# Altium PCB CapArray.PcbDoc
Units mil, origin at the board's own origin, x right, y up, seen from the top; angles counter-clockwise.
Board outline 2809.33 x 1157.4 mil, 2 copper layers (Top Layer, Bottom Layer); 100 components, 2 nets, 200 pads, 470 vias.
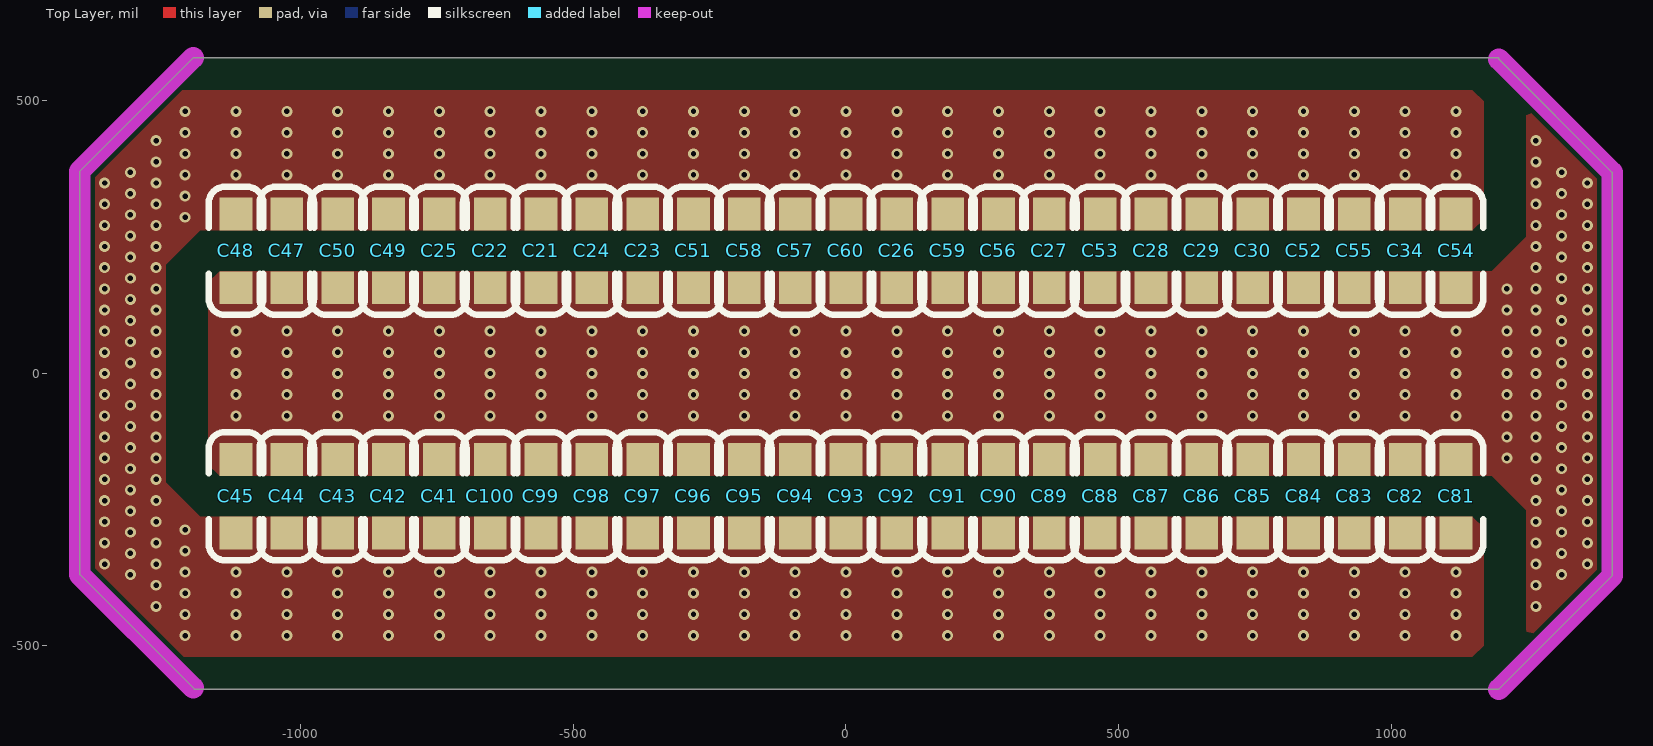
[diagram p0: Top Layer view]
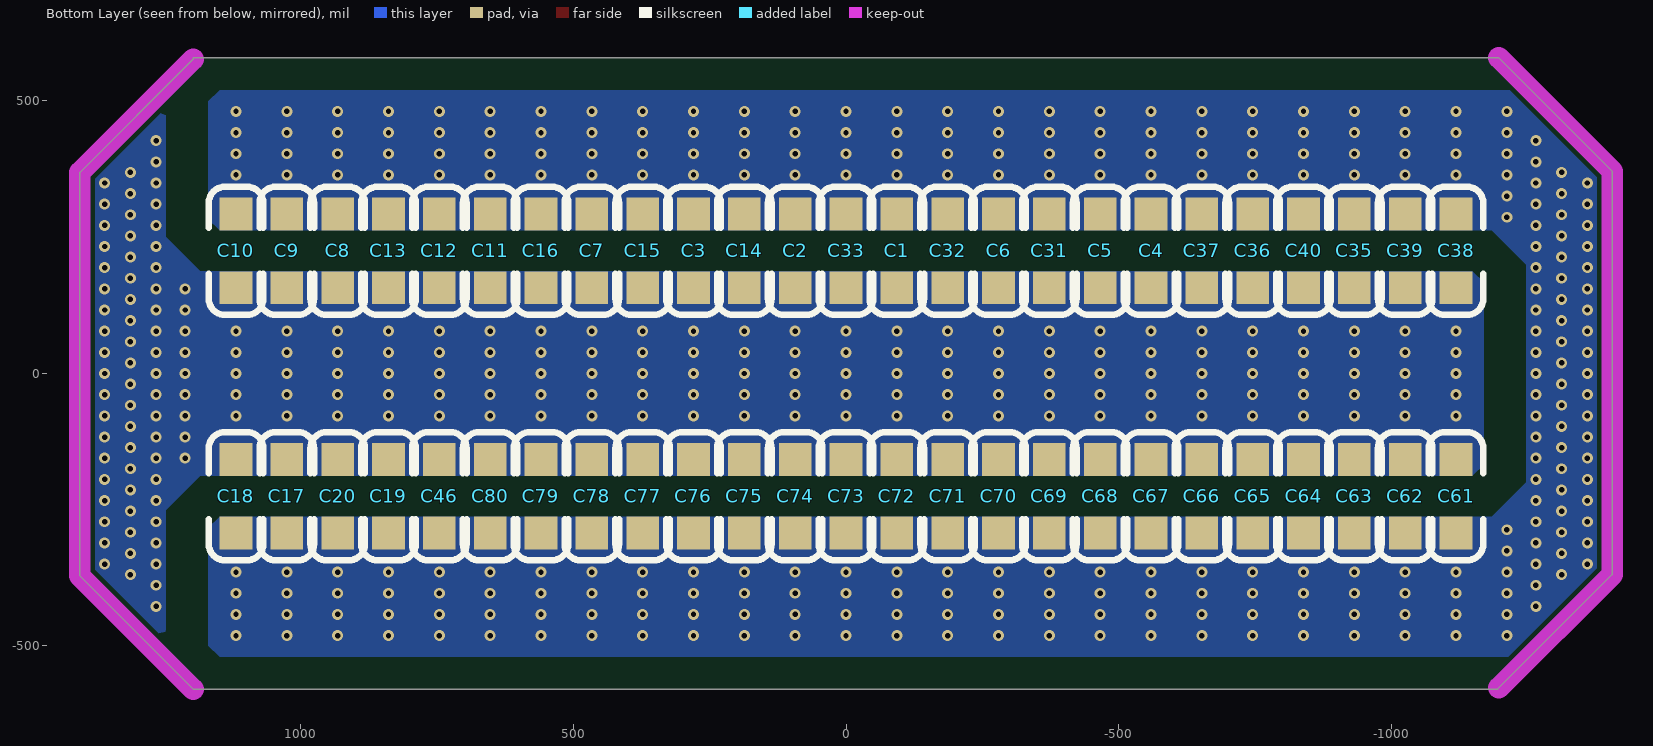
[diagram p1: Bottom Layer view, seen from below]

## Layer stack, top to bottom
Top Solder: solder mask 0.4, Solder Resist, Dk 3.5
Top Layer: signal copper 1.4
Dielectric 1: dielectric 12.6, FR-4, Dk 4.8
Bottom Layer: signal copper 1.4
Bottom Solder: solder mask 0.4, Solder Resist, Dk 3.5

## Board outline
-1404.66,-369.35 -1404.66,370.59 -1197.18,578.08 1197.18,578.08 1197.18,575.58 1404.66,368.09 1404.66,-369.34 1404.67,-371.85 1197.19,-579.33 -1194.68,-579.33

## Design rules (kind name [scope] priority, off if disabled: settings)
Clearance [All] p1: gap=8 ignorepadtopadclearanceinfootprint=FALSE
PlaneConnect [All] p1: planeconnectstyle=Direct reliefexpansion=20 reliefentries=4 reliefconductorwidth=10 reliefairgap=10
PolygonConnect [All] p1: connectstyle=Direct reliefconductorwidth=10 reliefentries=4 polygonreliefangle="90 Angle" airgapwidth=10
RoutingVias [All] p1: holewidth=28 width=50 viastyle="Through Hole" minholewidth=28 minwidth=50 maxholewidth=28 maxwidth=50
SolderMaskExpansion [All] p1: expansion=4 istentingtop=FALSE
SupplyNets "Schematic Supply Nets_1" [InNet('OUT')] p1: voltage=0.000
SupplyNets "Schematic Supply Nets" [InNet('IN')] p2: voltage=0.000
Width [All] p1: maxlimit=10 minlimit=10 preferedwidth=10
29 further rules are at their usual default settings.

## Components (designator, comment, footprint, x,y, rotation, side; value= is the part's Value field where it differs from the comment)
C1 "CAP" 1206C -93.2,156.85 r90 bottom
C2 "CAP" 1206C 93.2,156.85 r90 bottom
C3 "CAP" 1206C 279.61,156.85 r90 bottom
C4 "CAP" 1206C -559.22,156.85 r90 bottom
C5 "CAP" 1206C -466.02,156.85 r90 bottom
C6 "CAP" 1206C -279.61,156.85 r90 bottom
C7 "CAP" 1206C 466.02,156.85 r90 bottom
C8 "CAP" 1206C 932.04,156.85 r90 bottom
C9 "CAP" 1206C 1025.24,156.85 r90 bottom
C10 "CAP" 1206C 1118.44,156.85 r90 bottom
C11 "CAP" 1206C 652.43,156.85 r90 bottom
C12 "CAP" 1206C 745.63,156.85 r90 bottom
C13 "CAP" 1206C 838.83,156.85 r90 bottom
C14 "CAP" 1206C 186.41,156.85 r90 bottom
C15 "CAP" 1206C 372.81,156.85 r90 bottom
C16 "CAP" 1206C 559.22,156.85 r90 bottom
C17 "CAP" 1206C 1025.24,-158.11 r270 bottom
C18 "CAP" 1206C 1118.45,-158.11 r270 bottom
C19 "CAP" 1206C 838.83,-158.11 r270 bottom
C20 "CAP" 1206C 932.04,-158.11 r270 bottom
C21 "CAP" 1206C -559.22,156.85 r90 top
C22 "CAP" 1206C -652.43,156.85 r90 top
C23 "CAP" 1206C -372.81,156.85 r90 top
C24 "CAP" 1206C -466.02,156.85 r90 top
C25 "CAP" 1206C -745.63,156.85 r90 top
C26 "CAP" 1206C 93.2,156.85 r90 top
C27 "CAP" 1206C 372.81,156.85 r90 top
C28 "CAP" 1206C 559.22,156.85 r90 top
C29 "CAP" 1206C 652.43,156.85 r90 top
C30 "CAP" 1206C 745.63,156.85 r90 top
C31 "CAP" 1206C -372.81,156.85 r90 bottom
C32 "CAP" 1206C -186.41,156.85 r90 bottom
C33 "CAP" 1206C 0,156.85 r90 bottom
C34 "CAP" 1206C 1025.24,156.85 r90 top
C35 "CAP" 1206C -932.04,156.85 r90 bottom
C36 "CAP" 1206C -745.63,156.85 r90 bottom
C37 "CAP" 1206C -652.43,156.85 r90 bottom
C38 "CAP" 1206C -1118.44,156.85 r90 bottom
C39 "CAP" 1206C -1025.24,156.85 r90 bottom
C40 "CAP" 1206C -838.83,156.85 r90 bottom
C41 "CAP" 1206C -745.63,-158.11 r270 top
C42 "CAP" 1206C -838.83,-158.11 r270 top
C43 "CAP" 1206C -932.04,-158.11 r270 top
C44 "CAP" 1206C -1025.24,-158.11 r270 top
C45 "CAP" 1206C -1118.44,-158.11 r270 top
C46 "CAP" 1206C 745.63,-158.11 r270 bottom
C47 "CAP" 1206C -1025.24,156.85 r90 top
C48 "CAP" 1206C -1118.44,156.85 r90 top
C49 "CAP" 1206C -838.83,156.85 r90 top
C50 "CAP" 1206C -932.04,156.85 r90 top
C51 "CAP" 1206C -279.61,156.85 r90 top
C52 "CAP" 1206C 838.83,156.85 r90 top
C53 "CAP" 1206C 466.02,156.85 r90 top
C54 "CAP" 1206C 1118.44,156.85 r90 top
C55 "CAP" 1206C 932.04,156.85 r90 top
C56 "CAP" 1206C 279.61,156.85 r90 top
C57 "CAP" 1206C -93.2,156.85 r90 top
C58 "CAP" 1206C -186.41,156.85 r90 top
C59 "CAP" 1206C 186.41,156.85 r90 top
C60 "CAP" 1206C 0,156.85 r90 top
C61 "CAP" 1206C -1118.44,-158.11 r270 bottom
C62 "CAP" 1206C -1025.24,-158.11 r270 bottom
C63 "CAP" 1206C -932.04,-158.11 r270 bottom
C64 "CAP" 1206C -838.83,-158.11 r270 bottom
C65 "CAP" 1206C -745.63,-158.11 r270 bottom
C66 "CAP" 1206C -652.42,-158.11 r270 bottom
C67 "CAP" 1206C -559.22,-158.11 r270 bottom
C68 "CAP" 1206C -466.02,-158.11 r270 bottom
C69 "CAP" 1206C -372.81,-158.11 r270 bottom
C70 "CAP" 1206C -279.61,-158.11 r270 bottom
C71 "CAP" 1206C -186.41,-158.11 r270 bottom
C72 "CAP" 1206C -93.2,-158.11 r270 bottom
C73 "CAP" 1206C 0,-158.11 r270 bottom
C74 "CAP" 1206C 93.2,-158.11 r270 bottom
C75 "CAP" 1206C 186.41,-158.11 r270 bottom
C76 "CAP" 1206C 279.61,-158.11 r270 bottom
C77 "CAP" 1206C 372.82,-158.11 r270 bottom
C78 "CAP" 1206C 466.02,-158.11 r270 bottom
C79 "CAP" 1206C 559.22,-158.11 r270 bottom
C80 "CAP" 1206C 652.43,-158.11 r270 bottom
C81 "CAP" 1206C 1118.45,-158.11 r270 top
C82 "CAP" 1206C 1025.24,-158.11 r270 top
C83 "CAP" 1206C 932.04,-158.11 r270 top
C84 "CAP" 1206C 838.83,-158.11 r270 top
C85 "CAP" 1206C 745.63,-158.11 r270 top
C86 "CAP" 1206C 652.43,-158.11 r270 top
C87 "CAP" 1206C 559.22,-158.11 r270 top
C88 "CAP" 1206C 466.02,-158.11 r270 top
C89 "CAP" 1206C 372.82,-158.11 r270 top
C90 "CAP" 1206C 279.61,-158.11 r270 top
C91 "CAP" 1206C 186.41,-158.11 r270 top
C92 "CAP" 1206C 93.2,-158.11 r270 top
C93 "CAP" 1206C 0,-158.11 r270 top
C94 "CAP" 1206C -93.2,-158.11 r270 top
C95 "CAP" 1206C -186.41,-158.11 r270 top
C96 "CAP" 1206C -279.61,-158.11 r270 top
C97 "CAP" 1206C -372.81,-158.11 r270 top
C98 "CAP" 1206C -466.02,-158.11 r270 top
C99 "CAP" 1206C -559.22,-158.11 r270 top
C100 "CAP" 1206C -652.42,-158.11 r270 top

## Footprints (in the part's own frame and the unit in brackets; to place one, negate y for a bottom-side part, rotate by r counter-clockwise, add the part's x,y. Pads: shape width x height; smd on the part's side, far side on the other; paste and mask are expansions set on the pad)
1206C [mil]
  rect 60x60 smd: 1(0,0) 2(135,0)
  silkscreen extent -50,-50 185,50, body extent 2,-31 128,31, height 39

## Part data
C1 C2 C3 C4 C5 C6 C7 C8 C9 C10 C11 C12 C13 C14 C15 C16 C17 C18 C19 C20 C21 C22 C23 C24 C25 C26 C27 C28 C29 C30 C31 C32 C33 C34 C35 C36 C37 C38 C39 C40 C41 C42 C43 C44 C45 C46 C47 C48 C49 C50 C51 C52 C53 C54 C55 C56 C57 C58 C59 C60 C61 C62 C63 C64 C65 C66 C67 C68 C69 C70 C71 C72 C73 C74 C75 C76 C77 C78 C79 C80 C81 C82 C83 C84 C85 C86 C87 C88 C89 C90 C91 C92 C93 C94 C95 C96 C97 C98 C99 C100: "100uF,25V"

## Via types
v1: diameter 20, hole 10, Top Layer to Bottom Layer, tented both sides, 470 vias

## Nets (pads, with @x,y where several pads share a name; then routed paths per layer and width w, separated by ;. In a path a pad name is that pad's centre, name@x,y a point inside that pad or via, vN(x,y) a via of type N, cw(c..) or ccw(c..) an arc to the next point about the centre after c; other vN are vias at no path point)
IN: C1.1 C2.1 C3.1 C4.1 C5.1 C6.1 C7.1 C8.1 C9.1 C10.1 C11.1 C12.1 C13.1 C14.1 C15.1 C16.1 C17.1 C18.1 C19.1 C20.1 C21.1 C22.1 C23.1 C24.1 C25.1 C26.1 C27.1 C28.1 C29.1 C30.1 C31.1 C32.1 C33.1 C34.1 C35.1 C36.1 C37.1 C38.1 C39.1 C40.1 C41.1 C42.1 C43.1 C44.1 C45.1 C46.1 C47.1 C48.1 C49.1 C50.1 C51.1 C52.1 C53.1 C54.1 C55.1 C56.1 C57.1 C58.1 C59.1 C60.1 C61.1 C62.1 C63.1 C64.1 C65.1 C66.1 C67.1 C68.1 C69.1 C70.1 C71.1 C72.1 C73.1 C74.1 C75.1 C76.1 C77.1 C78.1 C79.1 C80.1 C81.1 C82.1 C83.1 C84.1 C85.1 C86.1 C87.1 C88.1 C89.1 C90.1 C91.1 C92.1 C93.1 C94.1 C95.1 C96.1 C97.1 C98.1 C99.1 C100.1
  other v1: 1264.85,-427.6 1264.85,-388.78 1312.09,-369.37 1264.85,-349.97 1359.33,-349.97 1312.09,-330.56 1264.85,-311.15 1359.33,-311.15 1312.09,-291.74 1264.85,-272.33 1359.33,-272.33 1312.09,-252.93 1264.85,-233.52 1359.33,-233.52 1312.09,-214.11 1264.85,-194.7 1359.33,-194.7 1312.09,-175.3 1211.65,-155.89 1264.85,-155.89 1359.33,-155.89 1312.09,-136.48 1211.65,-117.07 1264.85,-117.07 1359.33,-117.07 1312.09,-97.66 -1118.44,-78.26 -1025.24,-78.26 -932.04,-78.26 -838.83,-78.26 -745.63,-78.26 -652.43,-78.26 -559.22,-78.26 -466.02,-78.26 -372.81,-78.26 -279.61,-78.26 -186.41,-78.26 -93.2,-78.26 0,-78.26 93.2,-78.26 186.41,-78.26 279.61,-78.26 372.81,-78.26 466.02,-78.26 559.22,-78.26 652.43,-78.26 745.63,-78.26 838.83,-78.26 932.04,-78.26 1025.24,-78.26 1118.44,-78.26 1211.65,-78.26 1264.85,-78.26 1359.33,-78.26 1312.09,-58.85 -1118.44,-39.44 -1025.24,-39.44 -932.04,-39.44 -838.83,-39.44 -745.63,-39.44 -652.43,-39.44 -559.22,-39.44 -466.02,-39.44 -372.81,-39.44 -279.61,-39.44 -186.41,-39.44 -93.2,-39.44 0,-39.44 93.2,-39.44 186.41,-39.44 279.61,-39.44 372.81,-39.44 466.02,-39.44 559.22,-39.44 652.43,-39.44 745.63,-39.44 838.83,-39.44 932.04,-39.44 1025.24,-39.44 1118.44,-39.44 1211.65,-39.44 1264.85,-39.44 1359.33,-39.44 1312.09,-20.03 -1118.44,-0.63 -1025.24,-0.63 -932.04,-0.63 -838.83,-0.63 -745.63,-0.63 -652.43,-0.63 -559.22,-0.63 -466.02,-0.63 -372.81,-0.63 -279.61,-0.63 -186.41,-0.63 -93.2,-0.63 0,-0.63 93.2,-0.63 186.41,-0.63 279.61,-0.63 372.81,-0.63 466.02,-0.63 559.22,-0.63 652.43,-0.63 745.63,-0.63 838.83,-0.63 932.04,-0.63 1025.24,-0.63 1118.44,-0.63 1211.65,-0.63 1264.85,-0.63 1359.33,-0.63 1312.09,18.78 -1118.44,38.19 -1025.24,38.19 -932.04,38.19 -838.83,38.19 -745.63,38.19 -652.43,38.19 -559.22,38.19 -466.02,38.19 -372.81,38.19 -279.61,38.19 -186.41,38.19 -93.2,38.19 0,38.19 93.2,38.19 186.41,38.19 279.61,38.19 372.81,38.19 466.02,38.19 559.22,38.19 652.43,38.19 745.63,38.19 838.83,38.19 932.04,38.19 1025.24,38.19 1118.44,38.19 1211.65,38.19 1264.85,38.19 1359.33,38.19 1312.09,57.6 -1118.44,77.01 -1025.24,77.01 -932.04,77.01 -838.83,77.01 -745.63,77.01 -652.43,77.01 -559.22,77.01 -466.02,77.01 -372.81,77.01 -279.61,77.01 -186.41,77.01 -93.2,77.01 0,77.01 93.2,77.01 186.41,77.01 279.61,77.01 372.81,77.01 466.02,77.01 559.22,77.01 652.43,77.01 745.63,77.01 838.83,77.01 932.04,77.01 1025.24,77.01 1118.44,77.01 1211.65,77.01 1264.85,77.01 1359.33,77.01 1312.09,96.41 1211.65,115.82 1264.85,115.82 1359.33,115.82 1312.09,135.23 1211.65,154.64 1264.85,154.64 1359.33,154.64 1312.09,174.04 1264.85,193.45 1359.33,193.45 1312.09,212.86 1264.85,232.27 1359.33,232.27 1312.09,251.68 1264.85,271.08 1359.33,271.08 1312.09,290.49 1264.85,309.9 1359.33,309.9 1312.09,329.31 1264.85,348.71 1359.33,348.71 1312.09,368.12 1264.85,387.53 1264.85,426.34
OUT: C1.2 C2.2 C3.2 C4.2 C5.2 C6.2 C7.2 C8.2 C9.2 C10.2 C11.2 C12.2 C13.2 C14.2 C15.2 C16.2 C17.2 C18.2 C19.2 C20.2 C21.2 C22.2 C23.2 C24.2 C25.2 C26.2 C27.2 C28.2 C29.2 C30.2 C31.2 C32.2 C33.2 C34.2 C35.2 C36.2 C37.2 C38.2 C39.2 C40.2 C41.2 C42.2 C43.2 C44.2 C45.2 C46.2 C47.2 C48.2 C49.2 C50.2 C51.2 C52.2 C53.2 C54.2 C55.2 C56.2 C57.2 C58.2 C59.2 C60.2 C61.2 C62.2 C63.2 C64.2 C65.2 C66.2 C67.2 C68.2 C69.2 C70.2 C71.2 C72.2 C73.2 C74.2 C75.2 C76.2 C77.2 C78.2 C79.2 C80.2 C81.2 C82.2 C83.2 C84.2 C85.2 C86.2 C87.2 C88.2 C89.2 C90.2 C91.2 C92.2 C93.2 C94.2 C95.2 C96.2 C97.2 C98.2 C99.2 C100.2
  other v1: -1211.65,-481.14 -1118.44,-481.14 -1025.24,-481.14 -932.04,-481.14 -838.83,-481.14 -745.63,-481.14 -652.43,-481.14 -559.22,-481.14 -466.02,-481.14 -372.81,-481.14 -279.61,-481.14 -186.41,-481.14 -93.2,-481.14 0,-481.14 93.2,-481.14 186.41,-481.14 279.61,-481.14 372.81,-481.14 466.02,-481.14 559.22,-481.14 652.43,-481.14 745.63,-481.14 838.83,-481.14 932.04,-481.14 1025.24,-481.14 1118.44,-481.14 -1211.65,-442.33 -1118.44,-442.33 -1025.24,-442.33 -932.04,-442.33 -838.83,-442.33 -745.63,-442.33 -652.43,-442.33 -559.22,-442.33 -466.02,-442.33 -372.81,-442.33 -279.61,-442.33 -186.41,-442.33 -93.2,-442.33 0,-442.33 93.2,-442.33 186.41,-442.33 279.61,-442.33 372.81,-442.33 466.02,-442.33 559.22,-442.33 652.43,-442.33 745.63,-442.33 838.83,-442.33 932.04,-442.33 1025.24,-442.33 1118.44,-442.33 -1264.85,-427.6 -1211.65,-403.51 -1118.44,-403.51 -1025.24,-403.51 -932.04,-403.51 -838.83,-403.51 -745.63,-403.51 -652.43,-403.51 -559.22,-403.51 -466.02,-403.51 -372.81,-403.51 -279.61,-403.51 -186.41,-403.51 -93.2,-403.51 0,-403.51 93.2,-403.51 186.41,-403.51 279.61,-403.51 372.81,-403.51 466.02,-403.51 559.22,-403.51 652.43,-403.51 745.63,-403.51 838.83,-403.51 932.04,-403.51 1025.24,-403.51 1118.44,-403.51 -1264.85,-388.78 -1312.09,-369.37 -1211.65,-364.69 -1118.44,-364.69 -1025.24,-364.69 -932.04,-364.69 -838.83,-364.69 -745.63,-364.69 -652.43,-364.69 -559.22,-364.69 -466.02,-364.69 -372.81,-364.69 -279.61,-364.69 -186.41,-364.69 -93.2,-364.69 0,-364.69 93.2,-364.69 186.41,-364.69 279.61,-364.69 372.81,-364.69 466.02,-364.69 559.22,-364.69 652.43,-364.69 745.63,-364.69 838.83,-364.69 932.04,-364.69 1025.24,-364.69 1118.44,-364.69 -1359.33,-349.97 -1264.85,-349.97 -1312.09,-330.56 -1211.65,-325.88 -1359.33,-311.15 -1264.85,-311.15 -1312.09,-291.74 -1211.65,-287.06 -1359.33,-272.33 -1264.85,-272.33 -1312.09,-252.93 -1359.33,-233.52 -1264.85,-233.52 -1312.09,-214.11 -1359.33,-194.7 -1264.85,-194.7 -1312.09,-175.3 -1359.33,-155.89 -1264.85,-155.89 -1312.09,-136.48 -1359.33,-117.07 -1264.85,-117.07 -1312.09,-97.66 -1359.33,-78.26 -1264.85,-78.26 -1312.09,-58.85 -1359.33,-39.44 -1264.85,-39.44 -1312.09,-20.03 -1359.33,-0.63 -1264.85,-0.63 -1312.09,18.78 -1359.33,38.19 -1264.85,38.19 -1312.09,57.6 -1359.33,77.01 -1264.85,77.01 -1312.09,96.41 -1359.33,115.82 -1264.85,115.82 -1312.09,135.23 -1359.33,154.64 -1264.85,154.64 -1312.09,174.04 -1359.33,193.45 -1264.85,193.45 -1312.09,212.86 -1359.33,232.27 -1264.85,232.27 -1312.09,251.68 -1359.33,271.08 -1264.85,271.08 -1211.65,285.81 -1312.09,290.49 -1359.33,309.9 -1264.85,309.9 -1211.65,324.63 -1312.09,329.31 -1359.33,348.71 -1264.85,348.71 -1211.65,363.44 -1118.44,363.44 -1025.24,363.44 -932.04,363.44 -838.83,363.44 -745.63,363.44 -652.43,363.44 -559.22,363.44 -466.02,363.44 -372.81,363.44 -279.61,363.44 -186.41,363.44 -93.2,363.44 0,363.44 93.2,363.44 186.41,363.44 279.61,363.44 372.81,363.44 466.02,363.44 559.22,363.44 652.43,363.44 745.63,363.44 838.83,363.44 932.04,363.44 1025.24,363.44 1118.44,363.44 -1312.09,368.12 -1264.85,387.53 -1211.65,402.26 -1118.44,402.26 -1025.24,402.26 -932.04,402.26 -838.83,402.26 -745.63,402.26 -652.43,402.26 -559.22,402.26 -466.02,402.26 -372.81,402.26 -279.61,402.26 -186.41,402.26 -93.2,402.26 0,402.26 93.2,402.26 186.41,402.26 279.61,402.26 372.81,402.26 466.02,402.26 559.22,402.26 652.43,402.26 745.63,402.26 838.83,402.26 932.04,402.26 1025.24,402.26 1118.44,402.26 -1264.85,426.34 -1211.65,441.07 -1118.44,441.07 -1025.24,441.07 -932.04,441.07 -838.83,441.07 -745.63,441.07 -652.43,441.07 -559.22,441.07 -466.02,441.07 -372.81,441.07 -279.61,441.07 -186.41,441.07 -93.2,441.07 0,441.07 93.2,441.07 186.41,441.07 279.61,441.07 372.81,441.07 466.02,441.07 559.22,441.07 652.43,441.07 745.63,441.07 838.83,441.07 932.04,441.07 1025.24,441.07 1118.44,441.07 -1211.65,479.89 -1118.44,479.89 -1025.24,479.89 -932.04,479.89 -838.83,479.89 -745.63,479.89 -652.43,479.89 -559.22,479.89 -466.02,479.89 -372.81,479.89 -279.61,479.89 -186.41,479.89 -93.2,479.89 0,479.89 93.2,479.89 186.41,479.89 279.61,479.89 372.81,479.89 466.02,479.89 559.22,479.89 652.43,479.89 745.63,479.89 838.83,479.89 932.04,479.89 1025.24,479.89 1118.44,479.89

## Polygon pours and split planes (outlines as drawn)
IN on Top Layer (solid, remove dead copper, pour order 11): 1148.45,-188.11 1169,-167.55 1169,-148.66 1169,166.3 1148.44,186.85 -1148.44,186.85 -1169,166.3 -1169,147.41 -1169,-167.55 -1148.44,-188.11
OUT on Top Layer "NONET_L-01_P-001" (solid, pour order 23): -1148.44,261.85 -1184.05,261.85 -1247.18,198.72 -1247.18,-199.98 -1184.05,-263.11 -1148.44,-263.11 -1148.44,-519.96 -1254.05,-519.96 -1404.66,-369.35 -1404.66,370.59 -1256.55,518.71 -1148.44,518.71
OUT on Top Layer (solid, pour order 16): 1148.44,261.85 1169,282.41 1169,498.15 1148.44,518.71 -1148.44,518.71 -1169,498.15 -1169,282.41 -1148.44,261.85
IN on Top Layer "NONET_L-01_P-001" (solid, pour order 22): 1118.44,186.85 1184.05,186.85 1247.18,249.98 1247.18,525.58 1404.66,368.1 1404.66,-371.84 1246.19,-530.32 1246.19,-471.25 1247.19,-470.25 1247.19,-251.24 1184.06,-188.11 1118.44,-188.11
OUT on Top Layer (solid, pour order 17): 1148.44,-263.11 1169,-283.66 1169,-499.4 1148.44,-519.96 -1148.44,-519.96 -1169,-499.4 -1169,-283.66 -1148.44,-263.11
OUT on Bottom Layer "NONET_L-01_P-001" (solid, pour order 28): -1148.44,261.85 -1184.05,261.85 -1247.18,198.72 -1247.18,-199.98 -1184.05,-263.11 -1148.44,-263.11 -1148.44,-519.96 -1254.05,-519.96 -1404.66,-369.35 -1404.66,370.59 -1256.55,518.71 -1148.44,518.71
IN on Bottom Layer "NONET_L-01_P-001" (solid, pour order 27): 1118.44,186.85 1184.05,186.85 1247.18,249.98 1247.18,525.58 1404.66,368.1 1404.66,-371.84 1246.19,-530.32 1246.19,-471.25 1247.19,-470.25 1247.19,-251.24 1184.06,-188.11 1118.44,-188.11
OUT on Bottom Layer (solid, pour order 26): 1148.44,-263.11 1169,-283.66 1169,-499.4 1148.44,-519.96 -1148.44,-519.96 -1169,-499.4 -1169,-283.66 -1148.44,-263.11
OUT on Bottom Layer (solid, pour order 25): 1148.44,261.85 1169,282.41 1169,498.15 1148.44,518.71 -1148.44,518.71 -1169,498.15 -1169,282.41 -1148.44,261.85
IN on Bottom Layer (solid, remove dead copper, pour order 24): 1148.45,-188.11 1169,-167.55 1169,-148.66 1169,166.3 1148.44,186.85 -1148.44,186.85 -1169,166.3 -1169,147.41 -1169,-167.55 -1148.44,-188.11
IN on Bottom Layer (solid, remove dead copper, pour order 14): 1148.45,-188.11 1169,-167.55 1169,-148.66 1169,166.3 1148.44,186.85 -1148.44,186.85 -1169,166.3 -1169,147.41 -1169,-167.55 -1148.44,-188.11
no net on Top Solder "NONET_L-01_P-001" (solid): 1267.74,379.59 1247.18,359.03 1247.18,-357.78 1267.74,-378.34 1356.44,-378.34 1377,-357.78 1377,359.03 1356.44,379.59
no net on Top Solder "NONET_L-01_P-001" (solid): -1267.74,379.59 -1247.18,359.03 -1247.18,-357.78 -1267.74,-378.34 -1356.44,-378.34 -1377,-357.78 -1377,359.03 -1356.44,379.59
no net on Top Solder (solid): -1169,-68.18 -1148.44,-88.74 1148.44,-88.74 1169,-68.18 1169,66.93 1148.44,87.48 -1148.44,87.48 -1169,66.93 -1169,-49.44
no net on Top Solder "NONET_L-01_P-001" (solid): 1169,-499.4 1169,-383.03 1148.44,-362.48 -1148.44,-362.48 -1169,-383.03 -1169,-499.4 -1148.44,-519.96 1148.44,-519.96
no net on Top Solder "NONET_L-01_P-001" (solid, pour order 20): 1169,498.15 1169,381.78 1148.44,361.22 -1148.44,361.22 -1169,381.78 -1169,498.15 -1148.44,518.71 1148.44,518.71
no net on Bottom Solder "NONET_L-01_P-001" (solid): -1267.74,379.59 -1247.18,359.03 -1247.18,-357.78 -1267.74,-378.34 -1356.44,-378.34 -1377,-357.78 -1377,359.03 -1356.44,379.59
no net on Bottom Solder "NONET_L-01_P-001" (solid): 1267.74,379.59 1247.18,359.03 1247.18,-357.78 1267.74,-378.34 1356.44,-378.34 1377,-357.78 1377,359.03 1356.44,379.59
no net on Bottom Solder "NONET_L-01_P-001" (solid): 1169,498.15 1169,381.78 1148.44,361.22 -1148.44,361.22 -1169,381.78 -1169,498.15 -1148.44,518.71 1148.44,518.71
no net on Bottom Solder "NONET_L-01_P-001" (solid): 1169,-499.4 1169,-383.03 1148.44,-362.48 -1148.44,-362.48 -1169,-383.03 -1169,-499.4 -1148.44,-519.96 1148.44,-519.96
no net on Bottom Solder (solid): -1169,-68.18 -1148.44,-88.74 1148.44,-88.74 1169,-68.18 1169,66.93 1148.44,87.48 -1148.44,87.48 -1169,66.93 -1169,-49.44

## Keep-outs
Keep-Out Layer:
  lines w39.37: -1197.18,-576.83 -1404.66,-369.35 -1404.66,370.59 -1197.18,578.08 ; 1197.19,-579.33 1404.67,-371.85 ; 1197.18,575.58 1404.66,368.09 1404.66,-369.34

## Silkscreen, mask and mechanical layers (free items; w line width, h text height)
Mechanical 1:
  lines w10: 1404.66,-369.34 1404.67,-369.35 ; 1404.67,-369.35 1404.67,-371.85 1197.19,-579.33 -1194.68,-579.33 -1197.18,-576.83 -1404.66,-369.35 -1404.66,370.59 -1197.18,578.08 1197.18,578.08 1197.18,575.58 1404.66,368.09 1404.66,-369.34